# Altium PCB 驱动2.PcbDoc
Units mil, origin at the board's own origin, x right, y up, seen from the top; angles counter-clockwise.
Board outline 2955 x 1660 mil, 2 copper layers (Top Layer, Bottom Layer); 48 components, 41 nets, 225 pads, 284 vias.
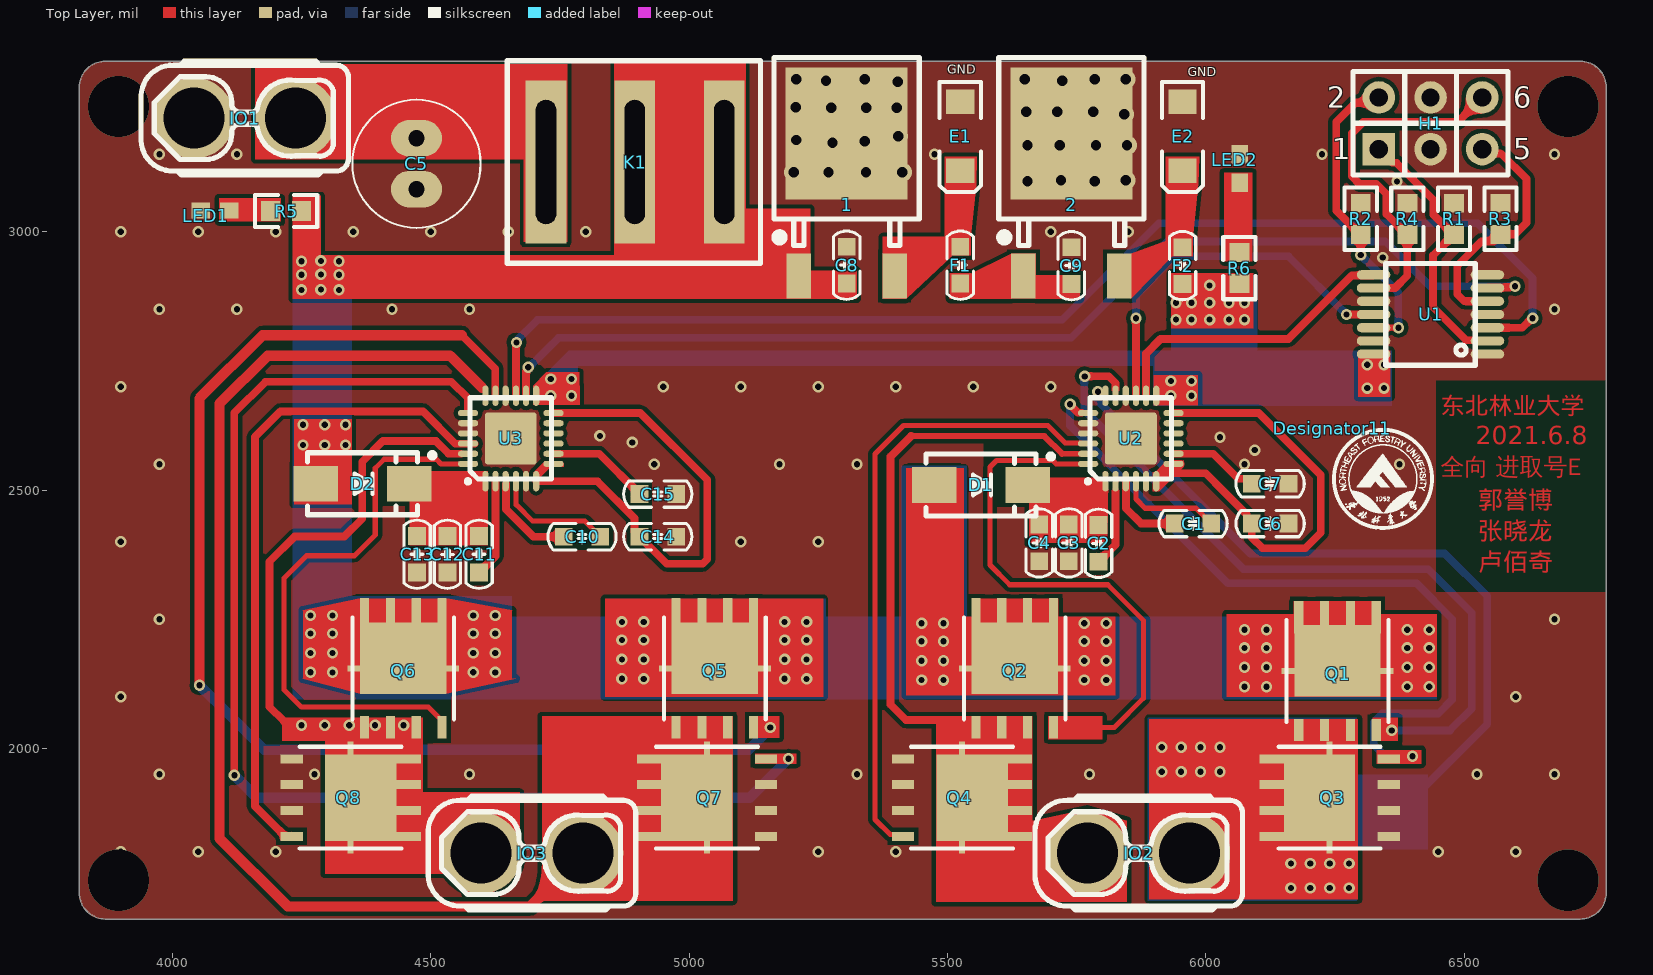
[diagram p0: Top Layer view]
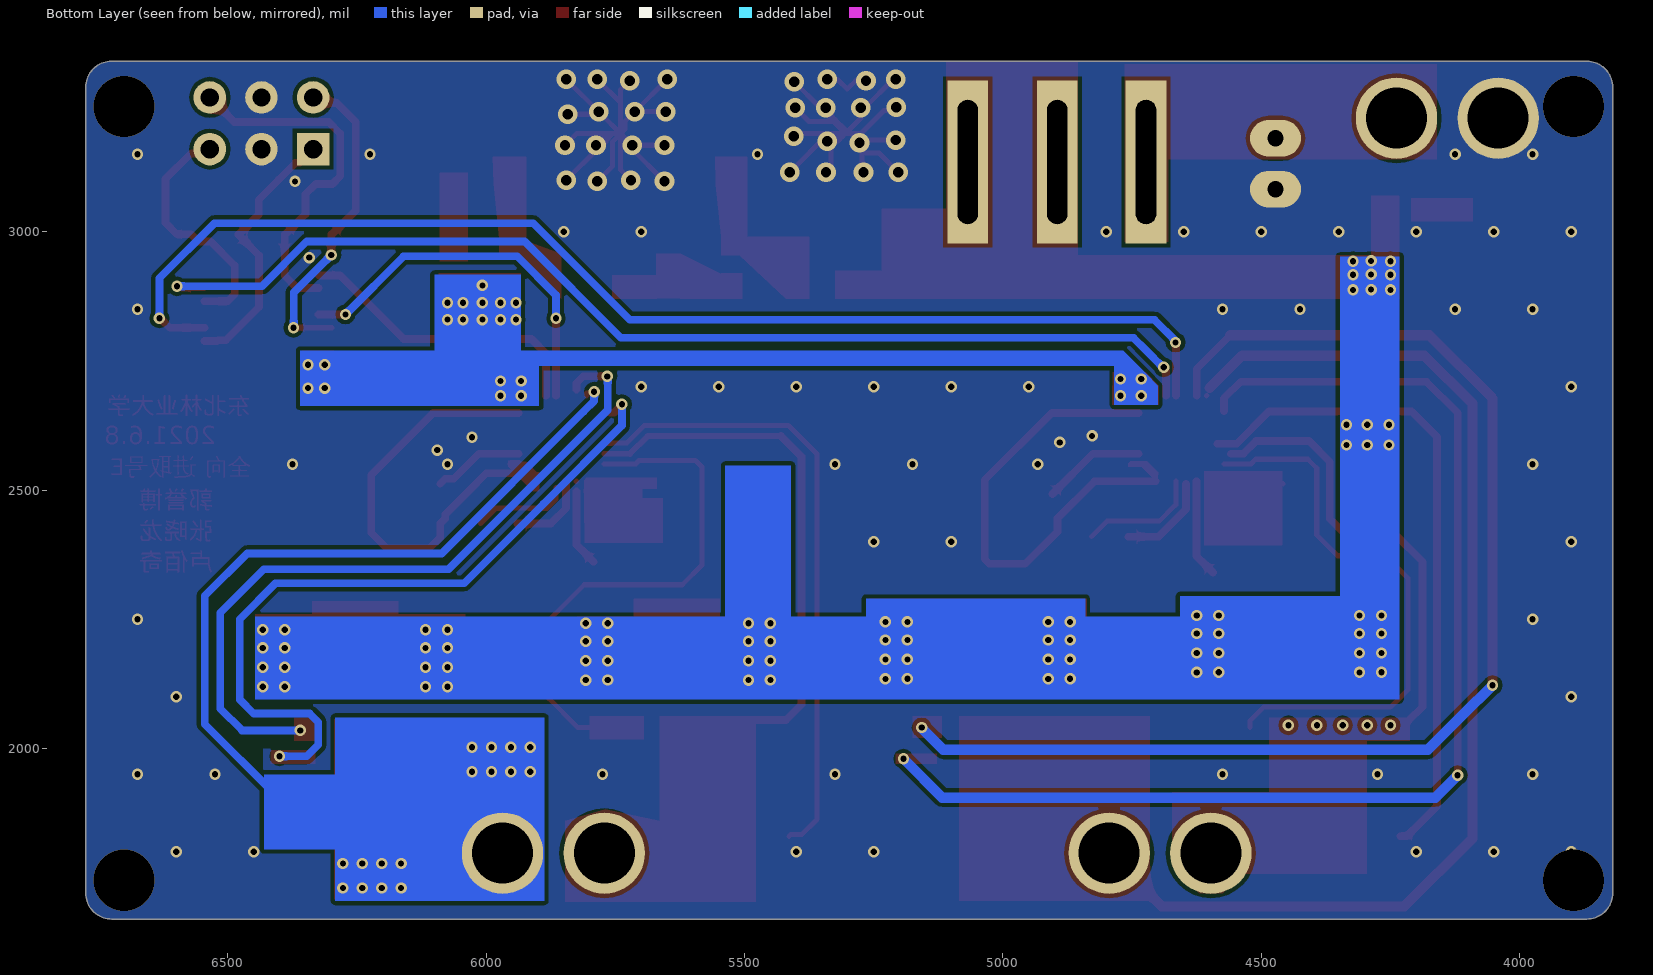
[diagram p1: Bottom Layer view, seen from below]

## Layer stack, top to bottom
Top Solder: solder mask 0.4, Solder Resist, Dk 3.5
Top Layer: signal copper 1.4
Dielectric 1: dielectric 12.6, FR-4, Dk 4.8
Bottom Layer: signal copper 1.4
Bottom Solder: solder mask 0.4, Solder Resist, Dk 3.5

## Board outline
3820,1720 ccw(c3870,1720) 3870,1670 6565,1670 6725,1670 ccw(c6725,1720) 6775,1720 6775,3280 ccw(c6725,3280) 6725,3330 3870,3330 ccw(c3870,3280) 3820,3280

## Design rules (kind name [scope] priority, off if disabled: settings)
Clearance [All] p1: gap=7.8 ignorepadtopadclearanceinfootprint=FALSE
PlaneConnect [All] p1: planeconnectstyle=Direct reliefexpansion=20 reliefentries=4 reliefconductorwidth=10 reliefairgap=10
PolygonConnect [All] p1: connectstyle=Direct reliefconductorwidth=10 reliefentries=4 polygonreliefangle="90 Angle" airgapwidth=10
RoutingVias [All] p1: holewidth=28 width=50 viastyle="Through Hole" minholewidth=28 minwidth=50 maxholewidth=28 maxwidth=50
SolderMaskExpansion [All] p1: expansion=4 istentingtop=FALSE
Width [All] p1: maxlimit=50 minlimit=10 preferedwidth=10
29 further rules are at their usual default settings.

## Components (designator, comment, footprint, x,y, rotation, side; value= is the part's Value field where it differs from the comment)
1 "LD291505V" LC-TO-252-2 5305,2914.41 r270 top locked
2 "LD29150_3v3" LC-TO-252-2 5740,2914.41 r270 top locked
C1 "100NF" 0603-C 5975,2435.43 r0 top
C2 "1UF" 0603-C 5792.5,2397.5 r270 top
C3 "10UF" 0603-C 5735,2397.5 r90 top
C4 "100NF" 0603-C 5677.5,2398.37 r270 top
C5 "220UF" "Cap electro 6_3x12_5x2_5mm" 4472.5,3131.86 r270 top
C6 "1UF" 0603-C 6125,2435.43 r180 top
C7 "1UF" 0603-C 6125,2512.5 r180 top
C8 "10UF" 0603-C 5305,2935.87 r270 top
C9 "10UF" 0603-C 5740,2934.92 r270 top
C10 "100NF" 0603-C 4792.5,2410 r0 top
C11 "1UF" 0603-C 4593.56,2376.38 r270 top
C12 "10UF" 0603-C 4532.5,2375.43 r90 top
C13 "100NF" 0603-C 4473.56,2376.38 r270 top
C14 "1UF" 0603-C 4940,2410 r180 top
C15 "1UF" 0603-C 4940,2492.5 r180 top
D1 "1N5819" SMA 5565,2510 r0 top
D2 "1N5819" SMA 4368.05,2512.5 r0 top
Designator11 "Comment" 校徽7.5mm 6245,2620 r0 top
E1 "47UF" A106C钽电容 5525,3185 r90 top
E2 "47UF" A106C钽电容 5955,3185 r90 top
F1 "FB" 0603-C 5525,2935.87 r270 top
F2 "FB" 0603-C 5955,2935 r270 top
H1 "header 2*3" HDR2.54-LI-2x3P 6435,3210 r0 top
IO1 "IO" XT30 4140,3220 r270 top
IO2 "IO" XT30 5870,1797.5 r270 top
IO3 "IO" XT30 4695.93,1797.5 r270 top
K1 "K" SW-SPDT-3A250V 4698.15,3135 r90 top locked
LED1 "LED" 0603-LED-R 4082.5,3040 r180 top
LED2 "LED" 0603-LED-R 6065,3122.34 r90 top
Q1 "TPH1R403NL" DFN5x6 6255,2150 r0 top locked
Q2 "TPH1R403NL" DFN5x6 5630.28,2155 r0 top
Q3 "TPH1R403NL" DFN5x6 6239.65,1905 r90 top
Q4 "TPH1R403NL" DFN5x6 5528.31,1905 r270 top
Q5 "TPH1R403NL" DFN5x6 5050,2155 r0 top
Q6 "TPH1R403NL" DFN5x6 4446.97,2155 r0 top
Q7 "TPH1R403NL" DFN5x6 5034.65,1905 r90 top
Q8 "TPH1R403NL" DFN5x6 4345,1905 r270 top
R1 "Res2" LC-0603_R 6480.16,3025 r270 top value=10K
R2 "Res2" LC-0603_R 6300,3025 r270 top value=10K
R3 "Res2" LC-0603_R 6570.23,3025 r90 top value=10K
R4 "Res2" LC-0603_R 6390.08,3025 r270 top value=10K
R5 "Res2" LC-0603_R 4220,3040 r180 top value=1K
R6 "Res2" LC-0603_R 6065,2929.87 r90 top value=1K
U1 "SN74HC125PWR" TSSOP14 6435,2840 r180 top
U2 "DRV8701E" QFN24-4x4 5855,2600 r90 top locked
U3 "DRV8701E" QFN24-4x4 4655,2600 r90 top

## Footprints (in the part's own frame and the unit in brackets; to place one, negate y for a bottom-side part, rotate by r counter-clockwise, add the part's x,y. Pads: shape width x height; smd on the part's side, far side on the other; paste and mask are expansions set on the pad)
0603-C [mm]
  rect 0.87x0.87 smd: 1(-0.889,0) 2(0.911,0)
  silkscreen extent -1.67,-0.65 1.69,0.65, body extent -1.28,-0.51 1.32,0.49, height 0.87
0603-LED-R [mm]
  round 0.2 on Top Overlay mask+0: 2(1.59,0.463)
  rect 0.9x0.8 smd: LED+(-0.7,-0.025) LED-(0.7,-0.025)
  body extent -0.8,-0.38 0.85,0.34, height 0.68
A106C钽电容 [mm] "长3.2mm，宽1.6mm，厚1.6mm"
  rect 1.2x1.4 smd: 1(-1.7,0) 2(1.7,0)
  silkscreen extent -2.74,-1.02 2.67,1.02, body extent -1.6,-0.8 1.6,0.8, height 1.6
"Cap electro 6_3x12_5x2_5mm" [mm]
  oval 1.8x2.5 hole 0.8: 1(-1.248,0) 2(1.254,0)
  silkscreen extent -3.15,-3.15 3.15,3.15, body extent -3.21,-3.15 3.14,3.2, height 13.03
DFN5x6 [mm]
  rect 0.45x1.6 smd: 1(-1.905,2.65) 1(-0.635,2.65) 1(0.635,2.65) 1(1.905,2.65)
  rect 5.5x0.3 smd: 1(0,0)
  rect 4.25x3.5 smd: 1(0,0.5)
  rect 0.45x1.1 smd: 2(1.905,-2.9) 3(-1.905,-2.9) 3(-0.635,-2.9) 3(0.635,-2.9)
  silkscreen extent -2.5,-2.5 2.5,2.5, body extent -2.45,-3 2.45,3, height 1
HDR2.54-LI-2x3P [mm] "双排排针，3x2脚"
  rect 1.6x1.6 hole 0.9: 1(-2.54,-1.27)
  round 1.6 hole 0.9: 2(-2.54,1.27) 3(0,-1.27) 4(0,1.27) 5(2.54,-1.27) 6(2.54,1.27)
  silkscreen extent -3.81,-2.54 3.81,2.54, body extent -3.81,-2.54 3.81,2.54, height 8.5
LC-0603_R [mm]
  rect 0.93x0.98 smd: 1(-0.77,0) 2(0.77,0)
  silkscreen extent -1.54,-0.79 1.53,0.79, body extent -0.85,-0.4 0.85,0.4, height 0.56
LC-TO-252-2 [mm]
  rect 2.2x1.2 smd: 1(0,-2.361) 3(-0.004,2.361)
  rect 6.5x6 smd: 2(-7,0)
  silkscreen extent -10.75,-3.57 -1.5,3.57, body extent -9.74,-3.27 0.2,3.27, height 2.44
QFN24-4x4 [mm]
  rrect10% 2.55x2.55 smd: 0(0,0)
  oval 1x0.3 smd: 1(-2.1,1.25) 2(-2.1,0.75) 3(-2.1,0.25) 4(-2.1,-0.25) 5(-2.1,-0.75) 6(-2.1,-1.25) 13(2.1,-1.25) 14(2.1,-0.75) 15(2.1,-0.25) 16(2.1,0.25) 17(2.1,0.75) 18(2.1,1.25)
  oval 0.3x1 smd: 7(-1.25,-2.1) 8(-0.75,-2.1) 9(-0.25,-2.1) 10(0.25,-2.1) 11(0.75,-2.1) 12(1.25,-2.1) 19(1.25,2.1) 20(0.75,2.1) 21(0.25,2.1) 22(-0.25,2.1) 23(-0.75,2.1) 24(-1.25,2.1)
  silkscreen extent -2.21,-2 2,2.21, body extent -2,-2 2,2, height 0.9
SMA [mm] "4.5x2.6*2.2mm（长宽高，不包括引脚）"
  rect 2.2x1.75 smd: 1(-2.3,0) 2(2.3,0)
  silkscreen extent -2.7,-1.52 3.56,1.52, body extent -2.53,-1.3 2.58,1.3, height 2.15
SW-SPDT-3A250V [mm]
  rect 8x2 hole 1 slot 6.1 at 0 deg: 1(0,-5) 2(0,-0.635) 3(0,-9.398)
  silkscreen extent -4.98,-11.18 4.98,1.27
TSSOP14 [mm]
  oval 1.65x0.45 smd: 1(-2.8,1.95) 2(-2.8,1.3) 3(-2.8,0.65) 4(-2.8,0) 5(-2.8,-0.65) 6(-2.8,-1.3) 7(-2.8,-1.95) 8(2.8,-1.95) 9(2.8,-1.3) 10(2.8,-0.65) 11(2.8,0) 12(2.8,0.65) 13(2.8,1.3) 14(2.8,1.95)
  silkscreen extent -2.2,-2.5 2.2,2.5, body extent -3.23,-2.6 3.23,2.6, height 1.55
XT30 [mm]
  round 4 hole 3: 1(0,2.5) 2(0,-2.5)
  silkscreen extent -2.8,-5.1 2.8,5.1
校徽7.5mm [mil]
  silkscreen extent 0,-196 196,0

## Part data
1: "5v转压"
2: "转压3v3"
C1 C2 C3 C4 C6 C7 C8 C9 C10 C11 C12 C13 C14 C15: library part C, "无极性贴片电容", BOM名称=无极性贴片电容, 学习资源=www.ooocke.com, 版权归属=源创客
C5: library part C+, "有极电容"
D1 D2: library part D, "二极管"
E1 E2: library part C-CD, "贴片钽电容", BOM名称=贴片钽电容, 学习资源=www.ooocke.com, 版权归属=源创客
F1 F2: "0欧磁珠"
H1: "编码器，PWM"
IO1 IO2 IO3: "接口"
K1: "开关"
Q1 Q2 Q3 Q4 Q5 Q6 Q7 Q8: "东芝 N沟 MOS"
R1 R2 R3 R4 R5 R6: library part Res2_3, "1K", LatestRevisionDate=17-Jul-2002, PackageDescription="Axial Device, Thru-Hole; 2 Leads; 0.4 in Pin Spacing", PackageReference=AXIAL-0.4, Published=8-Jun-2000, Publisher="Altium Limited"
U2 U3: "DRV8701E Ti全桥驱动芯片"
U1: Code_IPC=SOIC127P1030-20, Code_JEDEC=MS-013, ComponentLink1Description="Manufacturer Link", ComponentLink1URL=http://www.ti.com/, ComponentLink2Description=Datasheet, ComponentLink2URL=http://www-s.ti.com/sc/ds/sn74hc244.pdf, DatasheetVersion=May-1997, LatestRevisionDate=13-Apr-2006, LatestRevisionNote="IPC-7351 Footprint Added.", PackageDescription="20-Pin Plastic Small Outline Integrated Circuit 1.27 mm Pitch", PackageReference=DW020, PackageVersion=Mar-2000, Published=8-Jun-2000, Publisher="Altium Limited"

## Via types
v1: diameter 22, hole 12, Top Layer to Bottom Layer, tented both sides, 148 vias
v2: diameter 22, hole 12, Top Layer to Bottom Layer, 100 vias
v3: diameter 38, hole 20, Top Layer to Bottom Layer, 31 vias
v4: diameter 118.11, hole 118.11, Top Layer to Bottom Layer, 4 vias
v5: diameter 38, hole 20, Top Layer to Bottom Layer, tented both sides, 1 vias

## Nets (pads, with @x,y where several pads share a name; then routed paths per layer and width w, separated by ;. In a path a pad name is that pad's centre, name@x,y a point inside that pad or via, vN(x,y) a via of type N, cw(c..) or ccw(c..) an arc to the next point about the centre after c; other vN are vias at no path point)
3V3: F2.2 R6.1 U1.14 U2.13 U3.13 | length 38.1
  Top Layer w10: v1@6007.5,2860 6010,2862.5 6010,2867.5 6008.28,2869.22 v1@6008.28,2896.35
  other v1: 4732.5,2682.5 4772.5,2682.5 5932.5,2682.5 5972.5,2682.5 6312.5,2697.5 6345,2697.5 5932.5,2711.2 5972.5,2711.2 4732.5,2715 4772.5,2715 6312.5,2742.5 6345,2742.5 5942.5,2830 5972.5,2830 6007.5,2830 6045,2830 6075,2830 5942.5,2862.5 5972.5,2862.5 6007.5,2862.5 6045,2862.5 6075,2862.5 6007.5,2896.35
5V: 2.1 C9.2 F1.2
BAT: 1.1 C8.2 D1.1 D2.1 K1.1 K1.3 Q1.1 Q2.1 Q5.1 Q6.1 R5.1 | length 1449.8
  Top Layer w10: v1@4250.62,2916.88 4253.75,2913.75 4349.59,2913.75 ; v1(4252.82,2626.5) 4252.82,2604.68 4291.25,2566.25 v1@4291.25,2581.56 ; v1(4295,2626.5) 4294.25,2627.25 4292.93,2627.25 4291.25,2625.56 v1@4291.25,2581.56 ; v1@4320.33,2943.01 4349.59,2913.75 ; v1(4335,2626.5) 4291.25,2582.75 v1@4291.25,2581.56 ; 4546.25,2913.75 4349.59,2913.75
  Bottom Layer w10: v1@4250.62,2916.88 4250.62,2629.29 4252.82,2627.09 4251.56,2625.83 v1@4251.56,2588.44 ; v1@4252.5,2587.5 4252.5,2576.5 4252.5,2561.25 4290,2523.75 v1@4290,2580.31 ; v1@4292.92,2590.42 4292.92,2628.34 4290,2631.27 4290,2888.12 4290,2912.68 v1@4320.33,2943.01 ; v1@4292.92,2626.5 v1(4295,2626.5) ; v1(4295,2587.5) 4290,2582.5 v1@4290,2580.31 ; v1(4335,2626.5) 4296.1,2587.6 4296.1,2586.4 v1@4290,2580.31
  other v1: 6117.5,2119.49 6432.5,2119.49 6075,2119.69 6390,2119.69 5450,2132.5 5492.5,2132.3 5765,2132.5 5807.5,2132.3 4870,2135 4912.5,2134.8 5185,2135 5227.5,2134.8 4310,2147.3 4625,2147.3 4267.5,2147.5 4582.5,2147.5 6075,2157.09 6117.5,2157.09 6390,2157.09 6432.5,2157.09 5450,2169.9 5492.5,2169.9 5765,2169.9 5807.5,2169.9 4870,2172.4 4912.5,2172.4 5185,2172.4 5227.5,2172.4 4267.5,2184.9 4310,2184.9 4582.5,2184.9 4625,2184.9 6075,2194.69 6117.5,2194.69 6390,2194.69 6432.5,2194.69 5450,2207.5 5492.5,2207.5 5765,2207.5 5807.5,2207.5 4870,2210 4912.5,2210 5185,2210 5227.5,2210 4267.5,2222.5 4310,2222.5 4582.5,2222.5 4625,2222.5 6075,2229.69 6117.5,2229.69 6390,2229.69 6432.5,2229.69 5450,2242.5 5492.5,2242.5 5765,2242.5 5807.5,2242.5 4870,2245 4912.5,2245 5185,2245 5227.5,2245 4267.5,2257.5 4310,2257.5 4582.5,2257.5 4625,2257.5 4252.82,2587.5 4335,2587.5 4250,2887.5 4287.5,2888.12 4322.5,2887.5 4250,2916.88 4322.5,2916.88 4287.5,2917.5 4250,2943.01 4322.5,2943.01 4287.5,2943.64
GND: 1.2 2.2 C3.1 C4.2 C5.2 C6.1 C7.1 C8.1 C9.1 C12.1 C13.2 C14.1 C15.1 E1.2 E2.2 H1.3 H1.4 IO1.2 LED1.LED- LED2.LED- Q3.3 Q4.3 Q7.3 Q8.3 R1.1 R2.1 R3.2 R4.1 U1.1 U1.4 U1.7 U1.10 U1.13 U2.0 U2.5 U2.16 U2.20 U2.21 U3.0 U3.5 U3.16 U3.20 U3.21 | length 2544.4
  Top Layer w10: v3(5202.5,3115) 5240,3152.5 5272.5,3152.5 5272.5,3135 5270,3132.5 v3(5270,3115) ; v3(5206.25,3241.25) 5212.5,3235 5230,3235 1.2@5277.5,3187.5 ; v3(5207.5,3177.5) 5272.5,3177.5 v3(5277.5,3172.5) ; v3(5207.5,3295) 5212.5,3295 1.2@5267.5,3240 ; v3(5265,3292.5) 5285,3292.5 5301.25,3276.25 5320,3295 v3(5340,3295) ; 1.2@5266.8,3240 1.2@5267.5,3240 ; 1.2@5270,3155 5270,3165 v3(5277.5,3172.5) ; 1.2@5305,3197.5 5324.45,3216.95 1.2@5333.85,3226.35 ; 1.2@5327.35,3214.05 5337.5,3224.19 1.2@5337.5,3234.6 ; 1.2@5328.34,3185 1.2@5310,3185 ; 1.2@5330,3190 1.2@5337.5,3190 ; 1.2@5331.56,3228.65 1.2@5337.5,3234.6 ; v3(5342.5,3115) 5332.85,3124.65 5332.85,3167.85 v3(5340,3175) ; v3(5401.88,3240) 5375.08,3213.2 5328.2,3213.2 1.2 ; v3(5403.79,3290.48) 5353.11,3239.8 v5(5342.7,3239.8) 1.2@5337.5,3234.6 ; v3(5405,3185) 5400,3190 1.2@5337.5,3190 ; v3(5412.5,3115) 1.2@5337.5,3190 ; v3(5650,3295) v3(5712.5,3232.5) ; v3(5652.5,3232.5) v3(5712.5,3232.5) ; v3(5655,3097.5) 5721.25,3163.75 2.2@5740,3182.5 ; v3(5655,3167.5) v3(5717.5,3167.5) 2.2 ; v3(5720,3100) 5740,3120 2.2@5740,3182.5 ; v3(5722.5,3292.5) 5740,3275 2.2@5740,3250 ; 2.2@5752.5,3190 2.2@5765,3190 ; 2.2@5768.78,3173.72 5781.25,3161.25 5783.75,3161.25 v3(5845,3100) ; v3(5785,3097.5) 5755.7,3126.8 5755.7,3174.3 2.2 ; v3(5785,3295) 2.2@5740,3250 ; v3(5787.5,3167.5) 2.2@5780.03,3174.97 ; v3(5842.5,3227.5) 2.2@5777.5,3227.5 ; v3(5845,3295) 2.2@5777.5,3227.5 ; v3(5847.5,3167.5) 5825,3190 2.2@5765,3190 ; 1.2@5267.5,3240 v3(5275,3240) 5275,3220 1.2 ; v3(5277.5,3172.5) 5277.5,3177.5 1.2@5277.5,3187.5 ; 1.2@5277.5,3187.5 5280,3190 1.2 ; 1.2 5328.34,3190 5340,3178.34 v3(5340,3175) ; 1.2 1.2@5310,3185 ; 1.2@5310,3185 5320,3175 v3(5340,3175) ; v3(5712.5,3232.5) 2.2@5731.8,3213.2 ; 2.2@5731.8,3213.2 2.2@5740,3205 ; 2.2@5731.8,3213.2 5731.8,3198.2 2.2 ; 2.2@5740,3182.5 2.2 ; 2.2 5755,3190 5770.03,3174.97 2.2@5780.03,3174.97 ; 2.2 2.2@5777.5,3227.5 ; 2.2 2.2@5740,3205 ; 2.2@5740,3205 2.2@5740,3250 ; 2.2@5765,3190 2.2@5780.03,3174.97
  other v1: 4932.5,2550 6375,2550 6095,2577.5 4890,2592.5 6027.5,2602.5 4827.5,2605 6342.5,2950 6370,3097.5
  other v2: 3900,1800 4050,1800 4050,1800 4200,1800 4200,1800 5250,1800 5250,1800 5400,1800 5400,1800 6450,1800 6450,1800 6600,1800 6600,1800 3975,1950 3975,1950 4275,1950 4275,1950 4575,1950 4575,1950 5325,1950 5325,1950 5775,1950 5775,1950 6525,1950 6525,1950 6675,1950 6675,1950 3900,2100 3900,2100 6600,2100 6600,2100 3975,2250 3975,2250 6675,2250 3900,2400 3900,2400 5100,2400 5100,2400 5250,2400 5250,2400 3975,2550 3975,2550 5175,2550 5175,2550 5325,2550 5325,2550 6075,2550 6075,2550 3900,2700 3900,2700 4950,2700 4950,2700 5100,2700 5100,2700 5250,2700 5250,2700 5400,2700 5400,2700 5550,2700 5550,2700 5700,2700 5700,2700 3975,2850 3975,2850 4125,2850 4125,2850 4425,2850 4425,2850 4575,2850 4575,2850 6675,2850 6675,2850 3900,3000 3900,3000 4050,3000 4050,3000 4200,3000 4200,3000 4350,3000 4350,3000 4500,3000 4500,3000 4650,3000 4650,3000 4800,3000 4800,3000 5700,3000 5700,3000 5850,3000 5850,3000 3975,3150 3975,3150 4125,3150 4125,3150 5475,3150 5475,3150 6225,3150 6225,3150 6675,3150 6675,3150
  other v3: 5782.5,3232.5
  other v4: 3895.89,1745 6700.61,1745 3895.89,3242.6 6700.61,3242.6
"L A": IO3.2 Q6.3 Q8.1 U3.23 | length 983.2
  Top Layer w15: 4327.5,2030 4305,2052.5 4216.3,2052.5 4187.87,2080.92 4187.87,2361.23 4236.85,2410.21 4332.71,2410.21 4367.5,2445 4367.5,2555 4407.5,2595 4510.11,2595 4534.64,2570.47 U3.23@4558.64,2570.47
  other v1: 4250,2045 4295,2045 4342.5,2045 4392.5,2045 4447.5,2045
"L B": IO3.1 Q5.3 Q7.1 U3.18 | length 2199.1
  Top Layer w10: U3.18@4605.44,2683.02 U3.18
  Top Layer w20: 4600,2697.74 4537.5,2760.24 4184.29,2760.24 4091.2,2667.15 4091.2,1826.3 4223.19,1694.31 4692.73,1694.31 IO3.1@4783.43,1785
"L EN": U1.6 U3.14 | length 2158.2
  Top Layer w10: v1@4684.53,2730.21 4688.99,2734.68 v1(4688.99,2737.92) ; U1.6 U1.6@6546.71,2892.66 ; v1@6596.77,2892.66 v1(6598.57,2894.46)
  Top Layer w15: U3.14 v1@4684.53,2730.21 ; U1.6@6546.71,2892.66 v1@6596.77,2892.66
  Bottom Layer w15: v1(4688.99,2737.92) 4690.42,2737.92 4723.13,2770.63 4747.5,2795 5739.54,2795 5925.95,2981.41 6347.03,2981.41 6433.99,2894.46 v1(6598.57,2894.46)
"L IO": H1.1 R1.2 U1.2 | length 519.9
  Top Layer w15: H1.1 6361.5,3133.5 6368.96,3133.5 6402.47,3100 ; 6402.5,3100 6440.43,3062.07 6440.43,3033.43 6479.17,2994.69 R1.2 6440,2954.53 6440,2854.03 6503.78,2790.25 6519.45,2790.25 6520.88,2788.82 U1.2
"L PH": U1.3 U3.15 | length 2384
  Top Layer w10: U3.15 U3.15@4665.19,2683.02 ; v1@4665.19,2785.12 v1(4665.95,2785.88)
  Top Layer w15: U3.15@4665.19,2683.02 v1@4665.19,2785.12 ; U1.3 6612.52,2814.41 6630.61,2832.5 v1(6632.5,2832.5)
  Bottom Layer w15: v1(4665.95,2785.88) 4665.95,2789.12 4706.83,2830 5722.5,2830 5908.98,3016.48 6526.02,3016.48 6632.5,2910 v1(6632.5,2832.5)
"L PWM": H1.5 R3.1 U1.5 | length 482.3
  Top Layer w15: H1.5 6543.74,3151.26 6572.01,3151.26 6620.75,3102.52 6620.75,3017.57 6598.67,2995.49 6571.04,2995.49 6556.93,2981.38 6533.59,2981.38 6486.83,2934.62 6486.83,2879.15 6500.39,2865.59 U1.5
Net1_3: 1.3 E1.1 F1.1
Net2_3: 2.3 E2.1 F2.1
NetC1_1: C1.1 U2.3 | length 159.3
  Top Layer w15: U2.3 5845.5,2516.98 5845.5,2464.83 5874.9,2435.43 C1.1
NetC1_2: C1.2 U2.4 | length 188.3
  Top Layer w10: U2.4@5864.84,2505.14 5864.84,2482.63 5882.43,2465.05 5917.26,2465.05 5917.57,2465.36 5962.43,2465.36 5962.8,2464.99 5981.31,2464.99 C1.2
NetC2_1: C2.1 C3.2 C4.1 D1.2 U2.1 | length 94.5
  Top Layer w10: C2.1@5795.35,2427.15 5805.79,2437.58 U2.1
NetC2_2: C2.2 U2.2 | length 149.9
  Top Layer w10: U2.2 U2.2@5825.82,2516.98
  Top Layer w15: C2.2 5825.2,2394.34 5825.2,2497.5
NetC6_2: C6.2 U2.6 U2.7 U2.12 | length 848
  Top Layer w15: 5927.5,2532.5 6000,2532.5 6035.01,2497.49 6079.51,2452.99 6079.51,2445.06 C6.2 6089.13,2408.37 6110,2387.5 6192.5,2387.5 6222.5,2417.5 6222.5,2529.21 6102.5,2649.21 U2.12 ; U2.7 U2.7@5951.46,2550.79
NetC7_2: C7.2 U2.8 | length 175.5
  Top Layer w15: U2.8 6014.53,2570.47 6062.87,2522.13 6079.51,2522.13 C7.2
NetC10_1: C10.1 U3.3 | length 183.1
  Top Layer w15: U3.3@4645.77,2512.5 4645.77,2463.17 4698.94,2410 C10.1
NetC10_2: C10.2 U3.4 | length 233.6
  Top Layer w10: 4664.86,2471.58 U3.4@4664.86,2517.3 ; 4666.07,2471.58 4697.65,2440 4798.37,2440 C10.2
NetC11_1: C11.1 C12.2 C13.1 D2.2 U3.1 | length 151.5
  Top Layer w10: D2.2 4604.95,2512.5 4605.79,2513.34 U3.1
NetC11_2: C11.2 U3.2 | length 190
  Top Layer w15: C11.2 4625.47,2372.42 U3.2
NetC14_2: C14.2 U3.6 U3.7 U3.12 | length 920.3
  Top Layer w15: U3.6 4822.68,2517.32 4894.51,2445.49 4894.51,2419.63 C14.2 4956.63,2357.5 5026.21,2357.5 5035,2366.29 5035,2520 4905.79,2649.21 U3.12
NetC15_2: C15.2 U3.8 | length 198.8
  Top Layer w15: U3.8 4826.16,2570.47 C15.2
NetLED1_LED+: LED1.LED+ R5.2
NetLED2_LED+: LED2.LED+ R6.2
NetQ1_2: Q1.2 U2.17 | length 1443
  Top Layer w10: Q1.2 6330.83,2035 v1(6360,2035)
  Top Layer w15: v1(5765.7,2720.24) 5812,2720.24 5825.46,2706.78 U2.17@5825.46,2694.86
  Bottom Layer w15: v1(5765.7,2720.24) 5765,2719.53 5765,2655 6073.15,2346.85 6430.65,2346.85 6514.68,2262.82 6514.68,2077.18 6472.5,2035 v1(6360,2035)
NetQ2_2: Q2.2 U2.24 | length 1076.6
  Top Layer w10: Q2.2 5822.8,2040.83 5879.21,2097.24 5879.21,2248.03 5810.44,2316.8 5620.76,2316.8 5582.5,2355.06 5582.5,2544.93 5594.82,2557.25 5704.16,2557.25 5710.62,2550.79 U2.24
NetQ3_2: Q3.2 U2.19 | length 1422.6
  Top Layer w15: v1@5736.25,2666.25 5752.77,2649.73 U2.19@5760.14,2649.73 ; Q3.2@6352.46,1981.36 Q3.2
  Bottom Layer w15: v1(5737.5,2666.3) 5737.5,2625 5889.55,2472.95 6042.76,2319.74 6407.76,2319.74 6477.22,2250.28 6477.22,2094.72 6450,2067.5 6341.45,2067.5 6325,2051.05 6325,2007.5 6347.5,1985 v1(6400,1985)
NetQ4_2: Q4.2 U2.22 | length 1224.7
  Top Layer w10: Q4.2 5410.28,1833.86 5388.64,1833.86 5360,1862.5 5360,2570 5415.05,2625.05 5694.07,2625.05 5727.98,2591.14 5757.07,2591.14 5758.05,2590.16 U2.22
NetQ5_2: Q5.2 U3.17 | length 2448.3
  Top Layer w10: Q5.2 Q5.2@5128.33,2037.5 ; 5146.25,2041.25 5156.49,2041.25 v1(5157.22,2040.52)
  Top Layer w15: 4560.17,2800 4625.13,2735.04 U3.17@4625.13,2683.02
  Top Layer w20: v1(4052.5,2122.5) 4052.5,2677.51 4174.99,2800 4560.17,2800
  Bottom Layer w20: v1(4052.5,2122.5) 4109.9,2065.1 4177.5,1997.5 5115.43,1997.5 5157.22,2039.29 v1(5157.22,2040.52)
NetQ6_2: Q6.2 U3.24 | length 1090
  Top Layer w10: Q6.2 4521.97,2053.62 4495.59,2080 4249.96,2080 4216.27,2113.69 4216.27,2329.62 4259.79,2373.14 4352.47,2373.14 4392.8,2413.46 4392.8,2542.56 4409.99,2559.75 4511.13,2559.75 4520.09,2550.79 U3.24
NetQ7_2: Q7.2 U3.19 | length 2381.4
  Top Layer w10: Q7.2 v1(5192.5,1980)
  Top Layer w15: v1(4120.01,1948.2) 4120.01,2649.48 4180.53,2710 4539.82,2710 4572.32,2677.5 U3.19@4572.32,2653.31
  Bottom Layer w20: v1(4120.01,1948.2) 4163.22,1905 5117.5,1905 v1(5192.5,1980)
NetQ8_2: Q8.2 U3.22 | length 1281.5
  Top Layer w15: Q8.2 4218.03,1830 4160,1888.03 4160,2603.1 4209.35,2652.45 4228.31,2652.45 4228.66,2652.8 4353.84,2652.8 4354.19,2652.45 4485.05,2652.45 4547.5,2590 U3.22@4585,2590
"R A": IO2.2 Q2.3 Q4.1 U2.23 | length 1022.7
  Top Layer w10: 5722.05,2570.47 U2.23
  Top Layer w12: 5430,2604.75 5687.78,2604.75 5722.05,2570.47
  Top Layer w15: 5430,2604.75 5429.75,2604.75 5390,2565 5390,2085 5420,2055 5482.5,2055 5500,2037.5
"R B": IO2.1 Q1.3 Q3.1 U2.18 | length 1992.5
  Top Layer w10: v1(5791.3,2690.31) 5793.6,2688.01 5804.95,2688.01 5805.15,2688.21 5805.79,2688.21 U2.18 ; Q3.1@6219.96,1905 6238.74,1905 6239.65,1905.91 6239.65,1911.55 Q3.1@6258.52,1911.55
  Bottom Layer w15: v1(5791.3,2690.31) 5791.3,2672.44 5811.36,2652.38 6086.23,2377.5 6462.5,2377.5 6544.72,2295.28 6544.72,2047.22 6407.5,1910 6260.07,1910 6258.52,1911.55 6257.75,1910.77 6203.27,1910.77 6202.5,1910 6147.5,1910 6097.5,1910 6042.5,1910 5907.5,2045
  other v1: 6164.7,1730 6202.3,1730 6239.9,1730 6277.5,1730 6164.7,1777.5 6202.3,1777.5 6239.9,1777.5 6277.5,1777.5 5914.7,1955 5952.3,1955 5989.9,1955 6027.5,1955 5914.7,2002.5 5952.3,2002.5 5989.9,2002.5 6027.5,2002.5
"R EN": U1.8 U2.14 | length 585.1
  Top Layer w15: U2.14 5884.53,2764.53 5912.5,2792.5 6160,2792.5 6282.8,2915.3 6323.29,2915.3 U1.8
"R IO": H1.2 R2.2 U1.12 | length 624.8
  Top Layer w10: U1.12@6299.05,2814.41 U1.12 v1(6373.09,2814.41)
  Top Layer w15: v1(6300,2955) R2.2 6299.02,2994.69 6252.5,3041.2 6252.5,3212.5 6289.86,3249.86 6324.86,3249.86 H1.2
  Bottom Layer w10: v1@6372.5,2815 v1(6373.09,2814.41)
  Bottom Layer w15: v1(6300,2955) 6372.5,2882.5 v1@6372.5,2815
"R PH": U1.11 U2.15 | length 732.3
  Top Layer w10: U2.15 U2.15@5864.92,2682.76 ; v1@5864.92,2832.42 v1(5865,2832.5)
  Top Layer w15: U2.15@5864.92,2682.76 v1@5864.92,2832.42 ; v1(6272.5,2840) U1.11
  Bottom Layer w15: v1(5865,2832.5) 5865,2877.5 5940,2952.5 6160,2952.5 v1(6272.5,2840)
"R PWM": H1.6 R4.2 U1.9 | length 696.6
  Top Layer w15: U1.9@6324.17,2890.59 U1.9 6366.18,2891.18 6390.08,2915.08 R4.2 6389.09,2994.69 6350,3033.78 6350,3072.5 6330,3092.5 6297.5,3092.5 6282.5,3107.5 6282.5,3190 6305,3212.5 6487.5,3212.5 H1.6
VCC: C5.1 IO1.1 K1.2
pads on no net: LED1.2 LED2.2 U2.9 U2.10 U2.11 U3.9 U3.10 U3.11

## Polygon pours and split planes (outlines as drawn)
GND on Bottom Layer "GND_L02_P000" (solid, pour order 0): 3820,1720 ccw(c3870,1720) 3870,1670 6565,1670 6725,1670 ccw(c6725,1720) 6775,1720 6775,3280 ccw(c6725,3280) 6725,3330 3870,3330 ccw(c3870,3280) 3820,3280
GND on Top Layer "GND_L01_P001" (solid, pour order 1): 3820,1720 ccw(c3870,1720) 3870,1670 6565,1670 6725,1670 ccw(c6725,1720) 6775,1720 6775,3280 ccw(c6725,3280) 6725,3330 3870,3330 ccw(c3870,3280) 3820,3280

## Other copper
Top Layer:
  rectangle net 5V: 5670,2870 5756.76,2916.73
  rectangle net 3V3: 4698.17,2664.81 4788.47,2702.5
  rectangle net NetQ2_2: 5695,2017.5 5800,2062.5
  rectangle net "R B": 5890,1707.5 6295,2057.5
  rectangle net NetQ1_2: 6322.5,2015 6372.5,2060
  rectangle net BAT: 4379.36,2267.5 4530.77,2290.38
  rectangle net BAT: 6170,2247.5 6337.5,2285
  rectangle net "L A": 4212.5,2015 4250,2060
  rectangle net NetQ3_2: 6330,1970 6417.5,1997.5
  rectangle net NetQ1_2: 6335,2025 6370,2045
  rectangle net NetQ7_2: 5127.5,1970 5207.5,1990
  rectangle net NetQ5_2: 5117.5,2020 5175,2062.5
  rectangle net 3V3: 5899.11,2663.6 5985,2722.5
  rectangle net BAT: 4232.5,2942.5 4287.5,3070
  rectangle net BAT: 4232.5,2870 4872.5,2955
  rectangle net NetC2_1: 5657.5,2397.5 5810,2485
  rectangle net "L A": 4447.5,1757.5 4542.5,1862.5
  rectangle net "L A": 4300,1882.5 4485,2017.5
  rectangle net "L A": 4222.5,2015 4480,2055
  rectangle net NetC11_1: 4458.6,2392.5 4611.18,2537.5
  rectangle net NetC2_1: 5697.5,2420 5802.5,2507.5
  rectangle net BAT: 5547.5,2230 5715,2290
  rectangle net NetC2_1: 5669.21,2502.5 5807.5,2524.82
  rectangle net 3V3: 6295,2680 6357.5,2770
  rectangle net "L B": 4715,1705 5085,2062.5
  rectangle net "L A": 4295,1757.5 4485,2060
  rectangle net "R A": 5665,1702.5 5847.5,1860
  rectangle net "R A": 5477.5,1702.5 5665,2062.5
  rectangle net 3V3: 5932.5,2812.5 5982.5,2920
  rectangle net BAT: 4235,2472.5 4347.5,2637.5
  rectangle net BAT: 5420,2232.5 5532.5,2542.5
  rectangle net BAT: 6040,2100 6447.5,2260
  rectangle net BAT: 5420,2102.5 5825,2255
  rectangle net BAT: 4837.5,2100 5260,2290
  rectangle net BAT: 4252.5,2135 4657.5,2267.5
  rectangle net BAT: 4855,2870 5190,2977.5
  rectangle net 3V3: 5899.11,2663.6 5910,2700
  rectangle net 3V3: 6037.5,2872.5 6092.5,2920
  rectangle net NetLED2_LED+: 6035,2942.5 6090,3115
  rectangle net 3V3: 5932.5,2812.5 6092.5,2920
  rectangle net BAT: 5025,2975 5235,3045
  rectangle net BAT: 5025,2975 5110,2980
  rectangle net BAT: 5190,2870 5325,2925
  rectangle net BAT: 4855,2975 5110,3330
  rectangle net VCC: 4680,2980 4765,3325
  rectangle net VCC: 4160,3140 4765,3325
  rectangle net NetLED1_LED+: 4090,3020 4210,3065
  region net 3V3: 4698.05,2702.26 4723.72,2727.93 4787.75,2727.93 4787.75,2702.29
  pour cut-out: 6445,2712.5 6445,2302.5 6787.5,2302.5 6787.5,2712.5
  pour cut-out: 5964.93,2452.78 5969.55,2454.69 5985.92,2438.32 5985.92,2410.53 5964.93,2410.51
  pour cut-out: 5604.44,2467.75 5604.19,2467.5 5595,2467.5 5595,2539.04 5599.82,2543.87 5601.74,2541.95 5604.44,2541.95
  pour cut-out: 5570,2545.55 5570,2595 5672.86,2595 5677.55,2590.31 5676.68,2586.37 5675.72,2585.41 5609.86,2585.41
  pour cut-out: 4175.6,2064.06 4178.53,2064.06 4180.6,2066.13 4204.55,2042.19 4204.55,2012.56 4209.46,2007.65 4206.8,2005 4175,2005
  pour cut-out: 4490.07,2056.39 4490,2056.32 4490,2010 4503.94,2010 4505.85,2011.91 4505.85,2054.74
  pour cut-out: 4538.63,2070.28 4538.63,2099.49 4538.11,2100 4495,2100 4495,2099.03 4523.04,2070.99
  pour cut-out: 4760.88,2532.71 4761.08,2532.91 4761.08,2559.05 4815.52,2559.05 4879.21,2495.36 4879.21,2467.57 4929.06,2467.57 4929.06,2434.93 4927.7,2436.29 4899.91,2436.29 4807.68,2528.52 4763.08,2528.52
  pour cut-out: 4779.85,2430.54 4787.86,2430.54 4804.57,2413.83 4803.44,2412.69 4803.44,2385.07 4779.08,2385.07 4778.85,2385.3
  pour cut-out: 4707.79,2741.66 4712.77,2741.66 4724.21,2730.23 4716.46,2722.48 4716.46,2708 4697.59,2708 4697.81,2708.22 4697.81,2724.01
  region net "R A": 5665,1860 5770,1882.5 5847.5,1860
  region net BAT: 4530.74,2290.79 4530.74,2267.49 4530.75,2267.49 4530.77,2267.5 4657.5,2267.5
  region net BAT: 4252.5,2267.5 4363.23,2267.5 4363.25,2267.52 4363.2,2267.56 4363.2,2290.71
  pour cut-out: 4657.5,2135 4657.5,2133.28 4658.98,2131.8 4664.55,2135
  region net BAT: 4530,2106 4530,2135 4532.5,2135 4664.45,2135
  region net BAT: 4252.5,2135 4363.75,2135 4363.75,2111.25 4363.75,2105.9
  region net NetC14_2: 4699.41,2534.41 4720.94,2555.94 4754.06,2555.94 4757.5,2552.5 4757.5,2545 4731.89,2545 4701.13,2514.24
  region net "L A": 4485,1809.94 4574.94,1720 4620.06,1720 4672.5,1772.44 4672.5,1914.94 4495,1914.94 4485,1914.94
  region net NetC6_2: 5922.5,2555 5902.5,2535 5897.5,2535 5897.5,2497.5 5910,2497.5 5957.5,2545 5957.5,2557.5
  region net Net2_3: 5922.5,3145 5922.5,2977.5 5975,2987.5 5985,3092.5 5987.5,3145
  region net Net2_3: 5855,2957.5 5937.5,2987.5 5975,2987.5 5975,2952.5 5935,2952.5 5855,2870
  region net Net1_3: 5495,3145 5495,2990 5545,2990 5556.05,3090.69 5556.52,3145.1
  region net 5V: 5541.35,2916.98 5623.72,2957.48 5670.56,2957.48 5670.91,2870.99 5625,2870 5562.5,2870 5505,2870 5505,2920 5550,2920
  region net BAT: 5190,2870 5110,2975 5110,3045 5235,3045 5235,2870
  region net Net1_3: 5420,2870 5510,2955 5545,2955 5545,2990 5375,2990 5375,2870
  text "东北林业大学" at 6455,2635.32 h58
  text "2021.6.8" at 6522.5,2577.45 h60
  text "全向 进取号E" at 6455,2517.39 h58
  text "郭誉博  / 张晓龙 / 卢佰奇" at 6527.5,2332.5 h60
Bottom Layer:
  rectangle net "R B": 6285,1805 6430,1950
  rectangle net "R B": 5887.5,1705 6292.5,2060
  rectangle net BAT: 4840,2222.5 5265,2290
  rectangle net BAT: 4342.5,2235 4657.5,2295
  rectangle net BAT: 4232.5,2095 4347.5,2952.5
  rectangle net 3V3: 4775,2740 6100,2770
  rectangle net 3V3: 5910,2662.5 6360,2770
  rectangle net 3V3: 4700,2665 4785,2702.5
  rectangle net 3V3: 5900,2665 5985,2737.5
  rectangle net 3V3: 5897.5,2662.5 5910,2745
  rectangle net 3V3: 5932.5,2737.5 6100,2917.5
  rectangle net BAT: 4237.5,2095 6447.5,2255
  rectangle net BAT: 5410,2115 5537.5,2547.5
  pour cut-out: 6340.24,2022.97 6342.62,2020.59 6480.15,2020.59 6527.01,2067.45 6531.46,2067.45 6531.46,2052.62 6532.69,2051.39 6438.7,1957.39 6432.83,1957.39 6432.83,1999.67 6431.9,2000.6 6353.96,2000.6 6340.6,2013.96
  region net 3V3: 4722.5,2725 4767.5,2770 4785,2770 4785,2725
  region net 3V3: 4700,2702.5 4722.5,2725 4785,2725 4785,2702.5

## Silkscreen, mask and mechanical layers (free items; w line width, h text height)
Top Overlay:
  text "GND" at 5500,3300.42 h30
  text "GND" at 5965,3295.42 h30
Top Solder:
  region: 6445,2712.5 6445,2400 6465,2400 6562.5,2302.5 6785,2302.5 6785,2712.5
Mechanical 1:
  lines w20: 3820,1720 ccw(c3870,1720) 3870,1670 6565,1670 6725,1670 ccw(c6725,1720) 6775,1720 6775,3280 ccw(c6725,3280) 6725,3330 6565,3330 3870,3330 ccw(c3870,3280) 3820,3280 3820,1720

## Text inside footprints (layer, text, board x,y; h text height)
H1: Top Overlay "1" at 6245,3140 h40; Top Overlay "2" at 6235,3240 h40; Top Overlay "5" at 6595,3140 h40; Top Overlay "6" at 6595,3240 h40